# EAGLE board Temperaturmessung_NTC_backup (EAGLE 7.6.0)
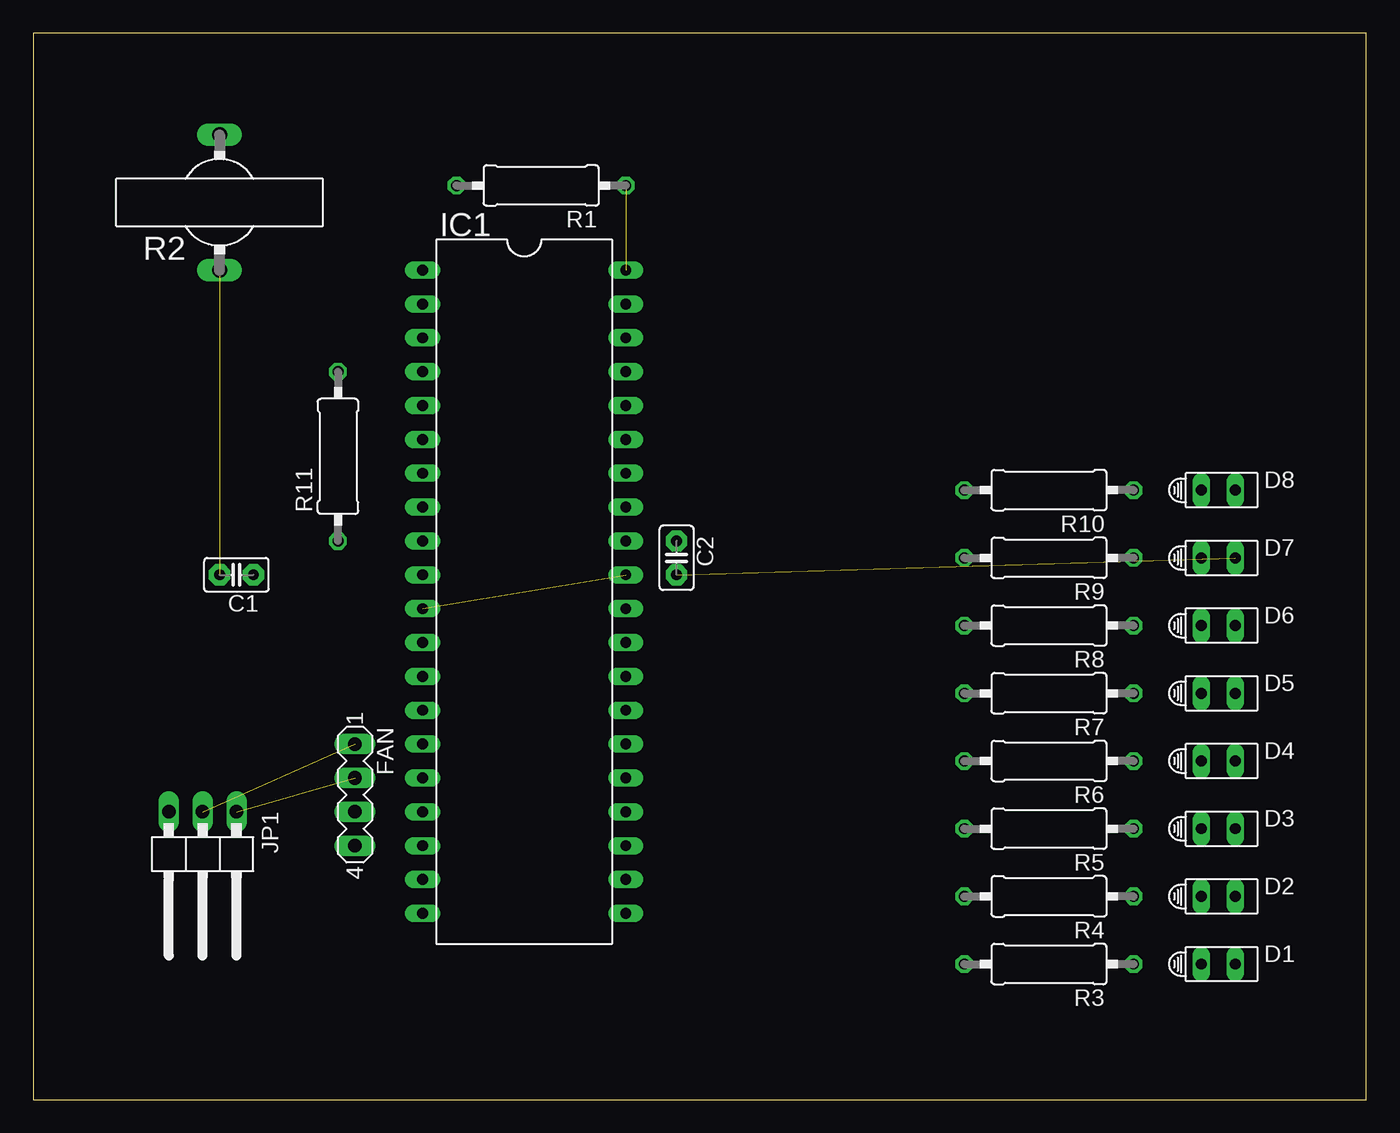
[diagram p0: board, top side]
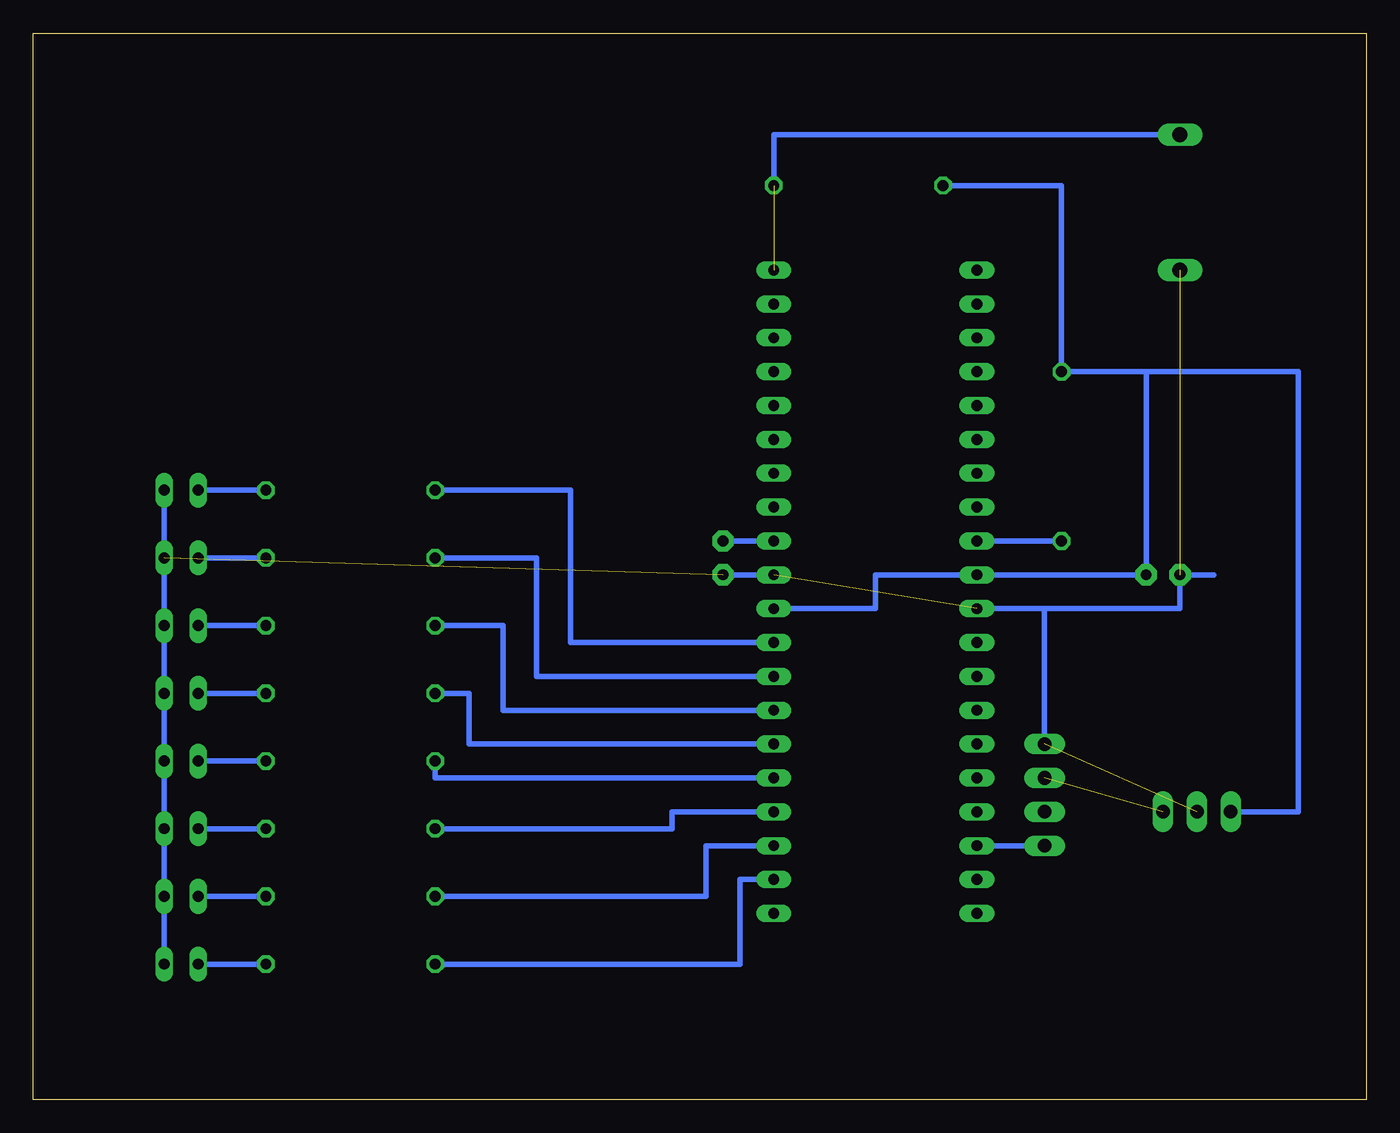
[diagram p1: board, bottom side, seen from below]

Size 100 x 80 mm. Coordinates in mm from the lower left corner, seen from the top.
Outline: 0,0 100,0 100,80 0,80 0,0
Copper layers (1*16): Top 0.035mm / dielectric 1.5mm / Bottom 0.035mm
Design rules "default": minimum track width 10mil, minimum drill 24mil, track to track 8mil, track to pad 8mil, pad to pad 8mil, via to via 8mil, smd to smd 8mil, copper to edge 40mil, drill to drill 8mil, minimum pad ring 10mil, minimum via ring 8mil, stop-mask expansion 4mil, vias tented up to drill 0mil, thermal gap 10mil

## Footprints (pad centres in the part's own frame; a part is rotated, then mirrored left to right if it is on the bottom)
C2.5-2 = drill 0.813 pad 1.6 octagon: 1 -1.27,0; 2 1.27,0
HLMP6 = drill 0.813 long: A -1.27,0; K 1.27,0
MA04-1 = drill 1.016 long: 1 -3.81,0; 2 -1.27,0; 3 1.27,0; 4 3.81,0
DIL40 = drill 0.813 long: 1 -24.13,-7.62; 2 -21.59,-7.62; 3 -19.05,-7.62; 4 -16.51,-7.62; 5 -13.97,-7.62; 6 -11.43,-7.62; 7 -8.89,-7.62; 8 -6.35,-7.62; 9 -3.81,-7.62; 10 -1.27,-7.62; 11 1.27,-7.62; 12 3.81,-7.62; 13 6.35,-7.62; 14 8.89,-7.62; 15 11.43,-7.62; 16 13.97,-7.62; 17 16.51,-7.62; 18 19.05,-7.62; 19 21.59,-7.62; 20 24.13,-7.62; 21 24.13,7.62; 22 21.59,7.62; 23 19.05,7.62; 24 16.51,7.62; 25 13.97,7.62; 26 11.43,7.62; 27 8.89,7.62; 28 6.35,7.62; 29 3.81,7.62; 30 1.27,7.62; 31 -1.27,7.62; 32 -3.81,7.62; 33 -6.35,7.62; 34 -8.89,7.62; 35 -11.43,7.62; 36 -13.97,7.62; 37 -16.51,7.62; 38 -19.05,7.62; 39 -21.59,7.62; 40 -24.13,7.62
1X03/90 = drill 1.016 long: 1 -2.54,-3.81; 2 0,-3.81; 3 2.54,-3.81
0309/12 = drill 0.813 octagon: 1 -6.35,0; 2 6.35,0
N644A = drill 1.118 long: 1 -5.08,0; 2 5.08,0

## Placement (x,y rotation side)
C1  200n  [C2.5-2]  15.24,39.37 180 top
C2  [C2.5-2]  48.26,40.64 270 top
D1  600nm  [HLMP6]  88.9,10.16 0 top
D2  600nm  [HLMP6]  88.9,15.24 0 top
D3  600nm  [HLMP6]  88.9,20.32 0 top
D4  600nm  [HLMP6]  88.9,25.4 0 top
D5  600nm  [HLMP6]  88.9,30.48 0 top
D6  600nm  [HLMP6]  88.9,35.56 0 top
D7  600nm  [HLMP6]  88.9,40.64 0 top
D8  600nm  [HLMP6]  88.9,45.72 0 top
FAN  [MA04-1]  24.13,22.86 270 top
IC1  MEGA32-P  [DIL40]  36.83,38.1 270 top
JP1  [1X03/90]  12.7,17.78 180 top
R1  6,5 kΩ  [0309/12]  38.1,68.58 180 top
R2  [N644A]  13.97,67.31 90 top
R3  220 Ω  [0309/12]  76.2,10.16 180 top
R4  220 Ω  [0309/12]  76.2,15.24 180 top
R5  220 Ω  [0309/12]  76.2,20.32 180 top
R6  220 Ω  [0309/12]  76.2,25.4 180 top
R7  220 Ω  [0309/12]  76.2,30.48 180 top
R8  220 Ω  [0309/12]  76.2,35.56 180 top
R9  220 Ω  [0309/12]  76.2,40.64 180 top
R10  220 Ω  [0309/12]  76.2,45.72 180 top
R11  10 kΩ  [0309/12]  22.86,48.26 90 top

## Library data of the parts
C1 = capacitor-wima
C2 = capacitor-wima; CAP: 100n
D1-D8 = display-hp; MF: AGILENT TECHNOLOGIES; MPN: HLMP-6500; OC_FARNELL: 1652490; OC_NEWARK: 40K0088
FAN = con-lstb; MF: PWM; MPN: Tacho; OC_FARNELL: Vcc; OC_NEWARK: GND
IC1 = atmel; MPN: ATMEGA32-16PU; OC_FARNELL: 1661729; OC_NEWARK: 51P1794
JP1 = pinhead
R1 R3-R10 = resistor
R2 = ptc-ntc; OC_FARNELL: unknown; OC_NEWARK: unknown
R11 = rcl

## Nets
+5V: C1.1 IC1.10 IC1.30 JP1.3 R1.2 R11.2
+12V: FAN.2 JP1.1
GND: C1.2 C2.2 D1.K D2.K D3.K D4.K D5.K D6.K D7.K D8.K FAN.1 IC1.11 IC1.31 JP1.2 R2.1
N$1: IC1.22 R3.2
N$2: IC1.40 R1.1 R2.2
N$3: FAN.4 IC1.18
N$4: IC1.23 R4.2
N$5: C2.1 IC1.32
N$6: IC1.24 R5.2
N$7: IC1.25 R6.2
N$8: IC1.26 R7.2
N$9: IC1.27 R8.2
N$10: IC1.28 R9.2
N$11: IC1.29 R10.2
N$12: D1.A R3.1
N$13: D2.A R4.1
N$14: D3.A R5.1
N$15: D4.A R6.1
N$16: D5.A R7.1
N$17: D6.A R8.1
N$18: D7.A R9.1
N$19: D8.A R10.1
N$20: IC1.9 R11.1

## Tracks (layer width: path | path; a pad name or v marks a point on that pad's centre or on a via)
+5V
  Bottom 0.406: R1.2 22.86,68.58 R11.2 | R11.2 17.78,54.61 | IC1.30 36.83,36.83 36.83,39.37 IC1.10 C1.1 16.51,54.61 | R11.2 16.51,54.61 | JP1.3 5.08,21.59 5.08,54.61 16.51,54.61
+12V  (1 unrouted)
GND  (4 unrouted)
  Bottom 0.406: 24.13,36.83 15.24,36.83 13.97,36.83 C1.2 11.43,39.37 | 24.13,36.83 IC1.11 | FAN.1 24.13,36.83 | IC1.31 C2.2 | D1.K D2.K D3.K D4.K D5.K D6.K D7.K D8.K
N$1
  Bottom 0.406: IC1.22 46.99,16.51 46.99,10.16 R3.2
N$2  (1 unrouted)
  Bottom 0.406: R2.2 44.45,72.39 R1.1
N$3
  Bottom 0.406: FAN.4 IC1.18
N$4
  Bottom 0.406: IC1.23 49.53,19.05 49.53,15.24 R4.2
N$5
  Bottom 0.406: IC1.32 C2.1
N$6
  Bottom 0.406: IC1.24 52.07,21.59 52.07,20.32 R5.2
N$7
  Bottom 0.406: IC1.25 69.85,24.13 R6.2
N$8
  Bottom 0.406: IC1.26 67.31,26.67 67.31,30.48 R7.2
N$9
  Bottom 0.406: IC1.27 64.77,29.21 64.77,35.56 R8.2
N$10
  Bottom 0.406: IC1.28 62.23,31.75 62.23,40.64 R9.2
N$11
  Bottom 0.406: IC1.29 59.69,34.29 59.69,45.72 R10.2
N$12
  Bottom 0.406: R3.1 D1.A
N$13
  Bottom 0.406: R4.1 D2.A
N$14
  Bottom 0.406: R5.1 D3.A
N$15
  Bottom 0.406: R6.1 D4.A
N$16
  Bottom 0.406: R7.1 D5.A
N$17
  Bottom 0.406: R8.1 D6.A
N$18
  Bottom 0.406: R9.1 D7.A
N$19
  Bottom 0.406: R10.1 D8.A
N$20
  Bottom 0.406: R11.1 IC1.9